# Altium PCB Car_seesaw.pcbdoc
Units mil, origin at the board's own origin, x right, y up, seen from the top; angles counter-clockwise.
Board outline 4957.01 x 4288.7 mil, 2 copper layers (Top Layer, Bottom Layer); 18 components, 28 nets, 169 pads, 13 vias.
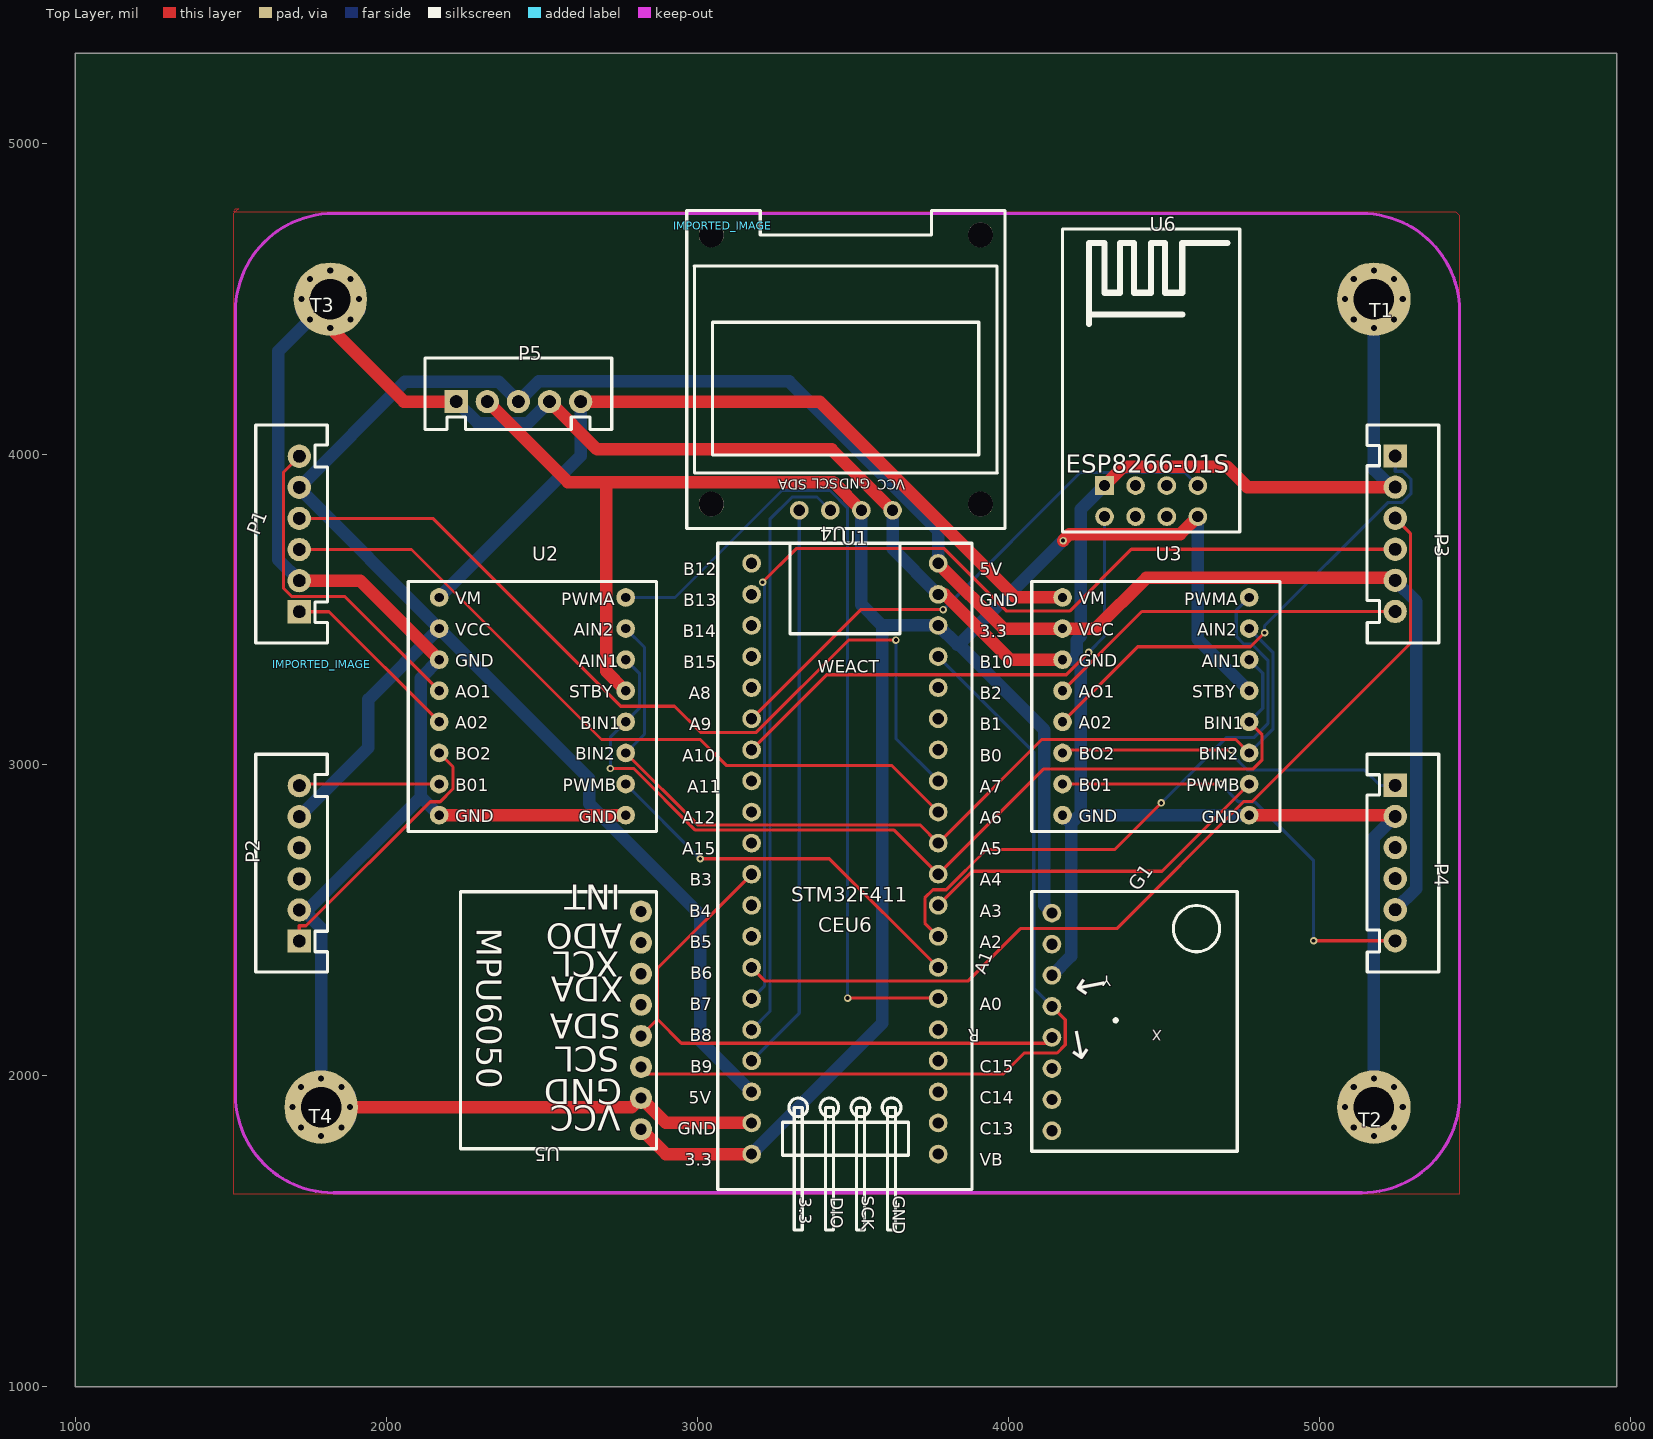
[diagram p0: Top Layer view]
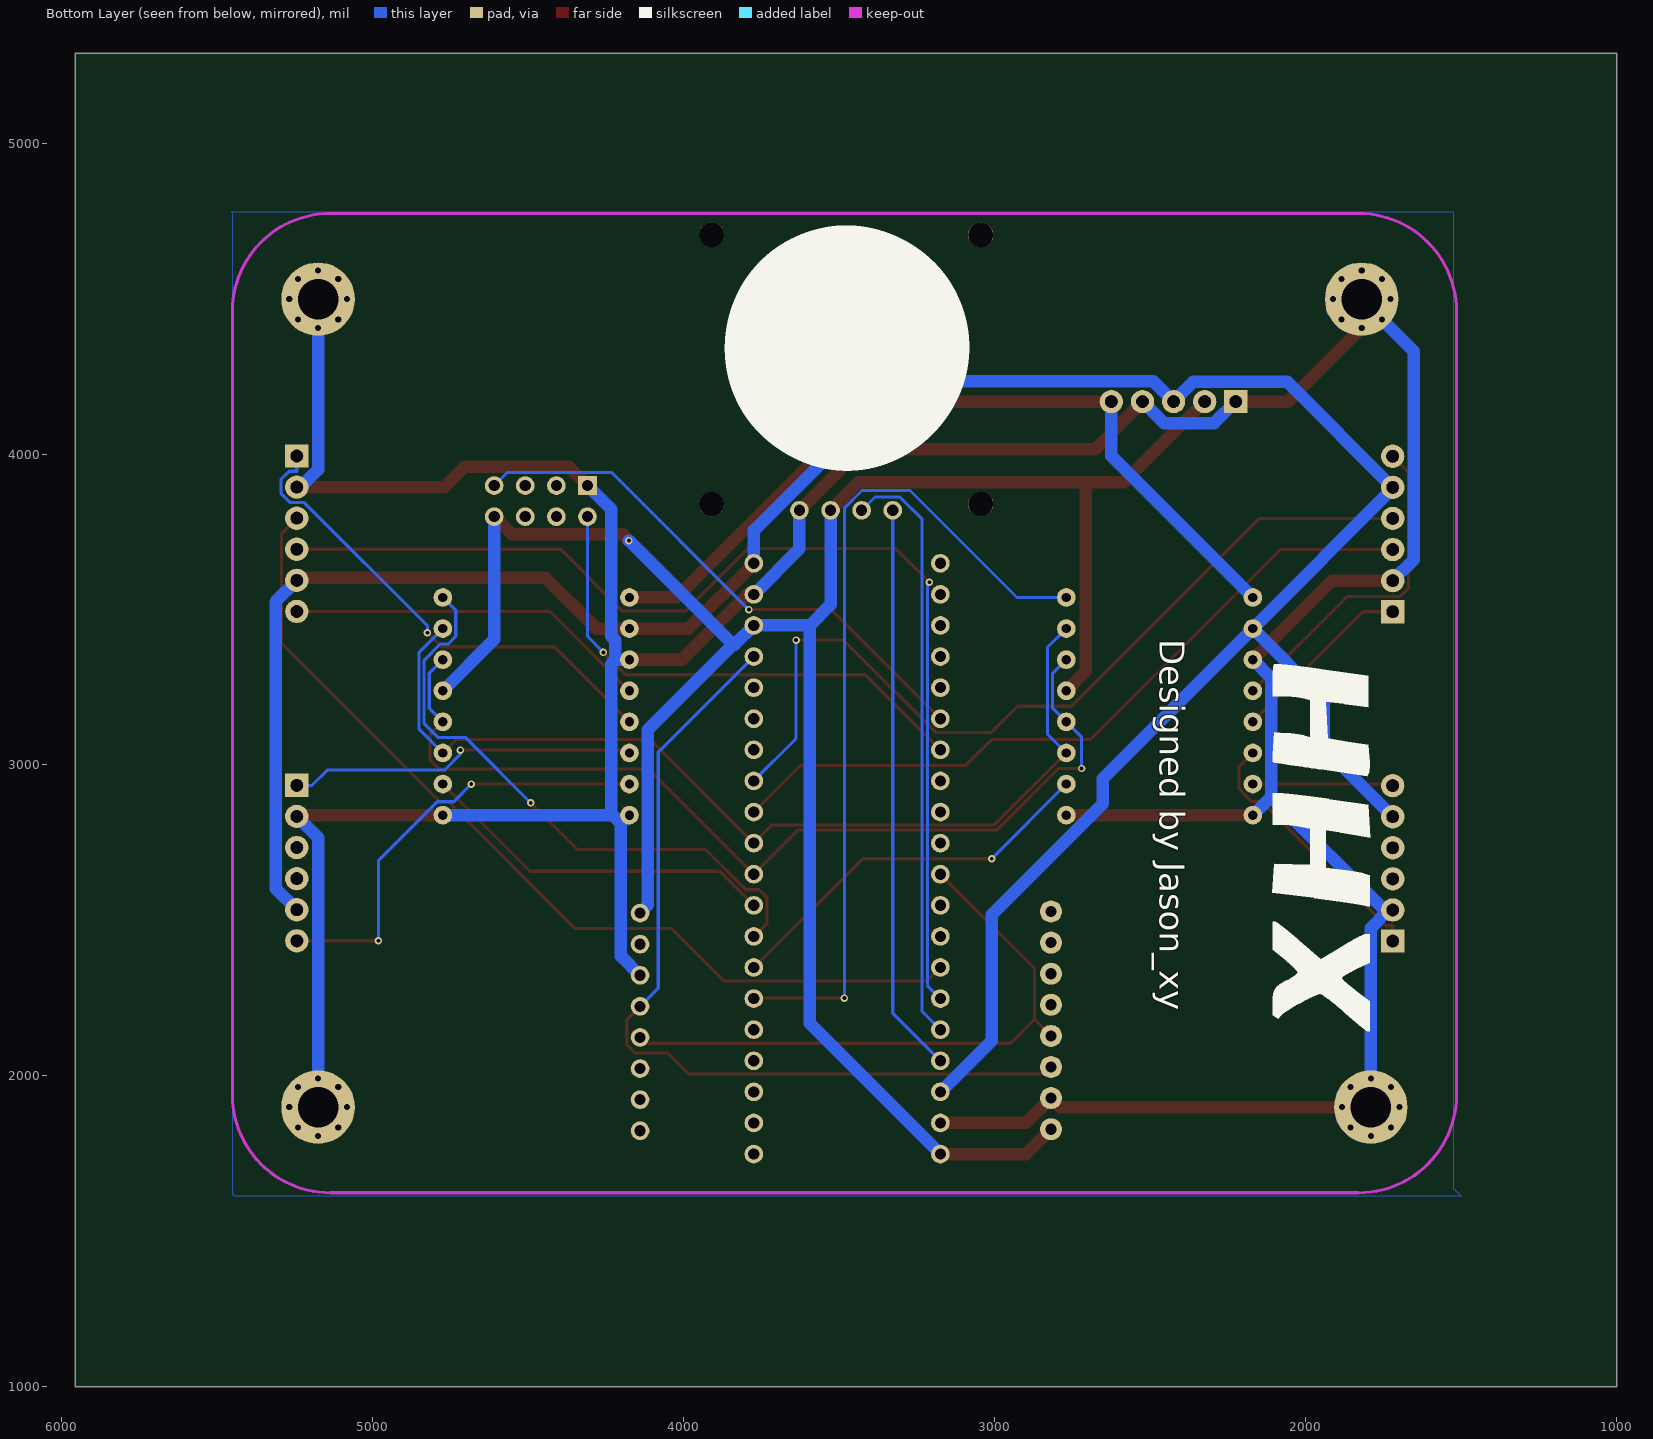
[diagram p1: Bottom Layer view, seen from below]

## Layer stack, top to bottom
Top Layer: signal copper (thickness not stored)
Dielectric: dielectric 12.6, FR-4, Dk 4.8
Bottom Layer: signal copper (thickness not stored)

## Board outline
5957.01,1000 1000,1000 1000,5288.7 5957.01,5288.7

## Components (designator, comment, footprint, x,y, rotation, side; value= is the part's Value field where it differs from the comment)
G1 "GY-86" GY-86 4340.79,2173.7 r0 top
IMPORTED_IMAGE "IMPORTED_IMAGE" IMPORTED_IMAGE 3082.44,4734.78 r0 top
IMPORTED_IMAGE "IMPORTED_IMAGE" IMPORTED_IMAGE 1792.52,3324.24 r0 top
P1 "XH2.54-6A" XH2.54-6P 1720,3742.9 r90 top
P2 "XH2.54-6A" XH2.54-6P 1720,2683.7 r90 top
P3 "XH2.54-6A" XH2.54-6P 5245,3743.7 r270 top
P4 "XH2.54-6A" XH2.54-6P 5245,2684.5 r270 top
P5 "XH2.54-5A" XH2.54-5P 2425,4193.7 r0 top
T1 "M3螺丝孔" 螺钉孔 5176.42,4498.11 r0 top
T2 "M3螺丝孔" 螺钉孔 5176.42,1899.68 r0 top
T3 "M3螺丝孔" 螺钉孔 1820,4498.11 r0 top
T4 "M3螺丝孔" 螺钉孔 1790.59,1899.68 r0 top
U1 "WEACT STM32F411CEU6" "WEACT STM32F411CEU6" 3475,2748.7 r0 top
U2 "TB6612" "DUAL TB6612FNG" 2470,3538.7 r0 top
U3 "TB6612" "DUAL TB6612FNG" 4475,3538.7 r0 top
U4 "OLED" OLED_0.96_4P_ZJY_NEW 3990,4783.7 r180 top
U5 "mpu6050" MPU6050 2819.21,1828.7 r180 top
U6 "ESP8266-01S" ESP8266-01S 4175,3748.7 r0 top

## Footprints (in the part's own frame and the unit in brackets; to place one, negate y for a bottom-side part, rotate by r counter-clockwise, add the part's x,y. Pads: shape width x height; smd on the part's side, far side on the other; paste and mask are expansions set on the pad)
"DUAL TB6612FNG" [mil]
  round 60 hole 30: 1(-300,0) 2(-300,-100) 3(-300,-200) 4(-300,-300) 5(-300,-400) 6(-300,-500) 7(-300,-600) 8(-300,-700) 9(300,-700) 10(300,-600) 11(300,-500) 12(300,-400) 13(300,-300) 14(300,-200) 15(300,-100) 16(300,0)
  silkscreen extent -399,-752 399,51
ESP8266-01S [mil]
  rect 60x60 hole 36: 1(135,150)
  round 60 hole 36: 2(235,150) 3(335,150) 4(435,150) 5(135,50) 6(235,50) 7(335,50) 8(435,50)
  silkscreen extent 0,0 570,975
GY-86 [mil]
  round 60 hole 36: 1(-200,350) 2(-200,250) 3(-200,150) 4(-200,50) 5(-200,-50) 6(-200,-150) 7(-200,-250) 8(-200,-350)
  silkscreen extent -265,-416 396,420
IMPORTED_IMAGE [mil]
MPU6050 [mm]
  round 1.8 hole 0.914: 1(0,0) 2(0,-2.54) 3(0,-5.08) 4(0,-7.62) 5(0,-10.16) 6(0,-12.7) 7(0,-15.24) 8(0,-17.78)
  silkscreen extent -1.27,-19.4 14.73,1.6
OLED_0.96_4P_ZJY_NEW [mil]
  round 60 hole 36: 1(361.81,964.56) 2(461.81,964.56) 3(561.81,964.56) 4(661.81,964.56)
  round 80 hole 80 unplated: ""(78.74,944.88) ""(78.74,78.74) ""(944.88,944.88) ""(944.88,78.74)
  silkscreen extent 0,0 1024,1024
"WEACT STM32F411CEU6" [mil]
  round 60 hole 36: 1(300,900) 2(300,800) 3(300,700) 4(300,600) 5(300,500) 6(300,400) 7(300,300) 8(300,200) 9(300,100) 10(300,0) 11(300,-100) 12(300,-200) 13(300,-300) 14(300,-400) 15(300,-500) 16(300,-600) 17(300,-700) 18(300,-800) 19(300,-900) 20(300,-1000) 21(-300,-1000) 22(-300,-900) 23(-300,-800) 24(-300,-700) 25(-300,-600) 26(-300,-500) 27(-300,-400) 28(-300,-300) 29(-300,-200) 30(-300,-100) 31(-300,0) 32(-300,100) 33(-300,200) 34(-300,300) 35(-300,400) 36(-300,500) 37(-300,600) 38(-300,700) 39(-300,800) 40(-300,900)
  silkscreen extent -409,-1244 409,965
XH2.54-5P [mil]
  rect 75x75 hole 40 slot 40.2 at 0 deg: 1(-200,-25)
  round 75 hole 40 slot 40.2 at 0 deg: 2(-100,-25) 3(0,-25) 4(100,-25) 5(200,-25)
  silkscreen extent -300,-115 300,115
XH2.54-6P [mil]
  rect 75x75 hole 40 slot 40.2 at 0 deg: 1(-250,-0.19)
  round 75 hole 40 slot 40.2 at 0 deg: 2(-150,-0.19) 3(-50,-0.19) 4(50,-0.19) 5(150,-0.19) 6(250,-0.39)
  silkscreen extent -350,-91 351,140
螺钉孔 [mm]
  round 1 hole 0.5: 1(-2.349,0) 1(-1.651,-1.651) 1(-1.651,1.651) 1(0,-2.349) 1(0,2.349) 1(1.651,-1.651) 1(1.651,1.651) 1(2.349,0)
  round 6 hole 3.302: 1(0,0)

## Via types
v1: diameter 24.02, hole 12.2, Top Layer to Bottom Layer, 13 vias

## Nets (pads, with @x,y where several pads share a name; then routed paths per layer and width w, separated by ;. In a path a pad name is that pad's centre, name@x,y a point inside that pad or via, vN(x,y) a via of type N, cw(c..) or ccw(c..) an arc to the next point about the centre after c; other vN are vias at no path point)
3V3: G1.1 P5.2 U1.3 U1.21 U2.13 U3.13 U4.2 U5.1 U6.8 | length 7532.6
  Top Layer w40.16: P5.2 2584,3909.7 2707.1,3909.7 ; U2.13 2707.1,3301.6 2707.1,3909.7 ; U5.1 2899.2,1748.7 U1.21 ; U4.2 3437.6,3909.7 2707.1,3909.7 ; v1(4176.7,3721.9) 4197.1,3742.2 4553.5,3742.2 U6.8
  Bottom Layer w40.16: U1.21 3595,2168.7 3595,3448.7 ; U4.2 3528.2,3515.5 3595,3448.7 ; G1.1 4116.2,2548.3 4116.2,3112.5 3841.8,3386.9 ; v1(4176.7,3721.9) 3841.8,3386.9 ; U6.8 4610,3403.7 U3.13 ; 3595,3448.7 U1.3 3836.8,3386.9 3841.8,3386.9
5V: P1.5 P2.5 P3.5 P4.5 P5.3 U1.1 U1.23 U2.2 U3.2 | length 8635
  Top Layer w40.16: U1.1 3985,3438.7 U3.2 4281.4,3438.7 4444.7,3601.9 5236.6,3601.9 P3.5
  Bottom Layer w40.16: P2.5 1942.1,3055.6 1942.1,3210.8 U2.2 ; U1.23 3009.6,2114.1 3009.6,2518.5 2653.2,2874.9 2653.2,2955.5 U2.2 ; U1.1 3775,3754.7 3295.7,4234 2490.3,4234 P5.3 2361,4232.7 2060,4232.7 P1.5 1720.2,3888.5 U2.2 ; P4.5 5312.8,2602.5 5312.8,3525.7 P3.5
12V: P5.5 U2.1 U3.1 | length 2629.4
  Top Layer w40.16: P5.5 3393.9,4168.7 4023.9,3538.7 U3.1
  Bottom Layer w40.16: U2.1 2625,3993.7 P5.5
GND: G1.3 P1.2 P2.2 P3.2 P4.2 P5.1 P5.4 T1.1 T2.1 T3.1 T4.1 U1.2 U1.22 U2.3 U2.8 U2.9 U3.3 U3.8 U3.9 U4.1 U5.2 U6.1 | length 15649.7
  Top Layer w40.16: T4.1@1698.1,1899.7 T4.1@1790.6,1899.7 ; P1.2 1915.8,3592.9 U2.3 ; T4.1@1725.6,1834.7 1763.1,1834.7 1790.6,1807.2 1818.1,1834.7 T4.1@1855.6,1834.7 ; T4.1@1725.6,1964.7 1763.1,1964.7 1790.6,1992.2 1818.1,1964.7 T4.1@1855.6,1964.7 ; T3.1@1727.5,4498.1 T3.1@1820,4498.1 ; T3.1@1755,4563.1 1792.5,4563.1 1820,4590.6 1847.5,4563.1 T3.1@1885,4563.1 ; T4.1@1883.1,1899.7 2790.2,1899.7 U5.2 2899.2,1848.7 U1.22 ; T3.1@1885,4433.1 1847.5,4433.1 1820,4405.6 2056.9,4168.7 P5.1 ; U2.8 U2.9 ; P5.4 2678.4,4015.3 3432,4015.3 U4.1 ; U1.2 3796.1,3548.7 4006.1,3338.7 U3.3 ; U6.1 4369.7,3958.4 4704.8,3958.4 4769.5,3893.7 P3.2 ; U3.9 5240.6,2838.7 P4.2 ; T2.1@5083.9,1899.7 T2.1@5176.4,1899.7 ; T2.1@5111.4,1834.7 5148.9,1834.7 5176.4,1807.2 5203.9,1834.7 T2.1@5241.4,1834.7 ; T2.1@5111.4,1964.7 5148.9,1964.7 T2.1@5176.4,1992.2 ; T1.1@5111.4,4433.1 5148.9,4433.1 5176.4,4405.6 5203.9,4433.1 T1.1@5241.4,4433.1 ; T1.1@5111.4,4563.1 5148.9,4563.1 T1.1@5176.4,4590.6
  Bottom Layer w40.16: T4.1@1698.1,1899.7 1698.1,1862.2 T4.1@1725.6,1834.7 ; P2.2 1732.6,2533.7 P2.2@1739.8,2526.5 ; P1.2 1653.3,3659.8 1653.3,4331.4 1755,4433.1 1727.5,4460.6 1727.5,4498.1 1727.5,4535.6 T3.1@1755,4563.1 ; T4.1@1790.6,1992.2 1790.6,2475.7 P2.2@1739.8,2526.5 ; T4.1@1855.6,1834.7 1883.1,1862.2 1883.1,1899.7 1883.1,1937.2 T4.1@1855.6,1964.7 ; T3.1@1885,4433.1 1912.5,4460.6 1912.5,4498.1 1912.5,4535.6 T3.1@1885,4563.1 ; U2.8 2111,2897.7 ; U2.3 2111,3279.7 2111,2897.7 ; P5.1 2294.4,4099.3 2455.6,4099.3 P5.4 ; U4.1 3628.2,3695.5 U1.2 ; G1.3 4202.4,2385.3 4202.4,2811.3 ; U3.8 4202.4,2811.3 ; U3.3 4220.2,3338.7 ; U6.1 4234.2,3822.9 4234.2,3414.5 4220.2,3400.5 4220.2,3338.7 ; U3.9 4234.2,2838.7 ; T2.1@5111.4,1834.7 5083.9,1862.2 5083.9,1899.7 5083.9,1937.2 T2.1@5111.4,1964.7 ; T1.1@5111.4,4433.1 5083.9,4460.6 5083.9,4498.1 5083.9,4535.6 T1.1@5111.4,4563.1 ; T2.1@5176.4,1992.2 5176.4,2766.1 P4.2 ; T1.1@5176.4,4498.1 5176.4,4405.6 5176.4,3949.7 5232.4,3893.7 P3.2 ; T2.1@5241.4,1834.7 5268.9,1862.2 5268.9,1899.7 5268.9,1937.2 T2.1@5241.4,1964.7 ; T1.1@5241.4,4433.1 5268.9,4460.6 5268.9,4498.1 5268.9,4535.6 T1.1@5241.4,4563.1 ; P2.2@1739.8,2526.5 2111,2897.7 ; 4202.4,2811.3 4229.8,2838.7 4234.2,2838.7 ; 4220.2,3338.7 4234.2,3324.6 4234.2,2838.7
I2C1_SCL: U1.25 U4.3 | length 1908.1
  Bottom Layer w10.24: U1.25 3233.6,2207.3 3233.6,3790.5 3305.1,3862 3385.3,3862 U4.3
I2C1_SDA: U1.24 U4.4 | length 1833.9
  Bottom Layer w10.24: U1.24 3328.2,2201.9 U4.4
I2C2_SCL: G1.4 U1.4 U5.3 | length 2830.6
  Top Layer w10.24: U5.3 2841.7,2006.2 3984.1,2006.2 4051.6,2073.7 4157.5,2073.7 4183.6,2099.8 4183.6,2180.9 G1.4
  Bottom Layer w10.24: U1.4 4082.3,3041.4 4082.3,2282.2 G1.4
I2C2_SDA: G1.5 U1.30 U5.4 | length 1975.5
  Top Layer w10.24: U5.4 2872.3,2181.7 ; U1.30 2872.3,2346 2872.3,2181.7 ; G1.5 4122,2104.9 2949.1,2104.9 2872.3,2181.7
M1+: P1.6 U2.4 | length 1083
  Top Layer w10.24: P1.6 1669.4,3941.9 1669.4,3568.1 1695.6,3541.9 1866.8,3541.9 U2.4
M1-: P1.1 U2.5 | length 596.5
  Top Layer w10.24: P1.1 1815.8,3492.9 U2.5
M2+: P2.6 U2.7 | length 451.7
  Top Layer w10.24: P2.6 1725.4,2938.7 U2.7
M2-: P2.1 U2.6 | length 859.9
  Top Layer w10.24: P2.1 1720.2,2482.7 1741.8,2482.7 2141,2881.8 2173.2,2881.8 2214.7,2923.3 2214.7,2994 U2.6
M3+: P3.6 U3.4 | length 1175.2
  Top Layer w10.24: U3.4 4430,3493.7 P3.6
M3-: P3.1 U3.5 | length 1593.7
  Top Layer w10.24: U3.5 4416.5,3380.2 4779.5,3380.2 v1(4824.5,3425.2)
  Bottom Layer w10.24: v1(4824.5,3425.2) 4824.5,3447.4 5220.8,3843.7 5265.7,3843.7 5295.8,3873.8 5295.8,3918.2 5269.3,3944.7 5244.8,3944.7 P3.1
M4+: P4.6 U3.7 | length 1429.4
  Top Layer w10.24: U3.7 v1(4684,2938.7) ; v1(4982.3,2434.5) P4.6
  Bottom Layer w10.24: v1(4684,2938.7) 4740.6,2882 4792.5,2882 4982.3,2692.2 v1(4982.3,2434.5)
M4-: P4.1 U3.6 | length 1128.3
  Top Layer w10.24: U3.6 4184.2,3047.9 v1(4718.7,3047.9)
  Bottom Layer w10.24: v1(4718.7,3047.9) 4718.7,3034.7 4769.9,2983.5 5146.8,2983.5 5195.8,2934.5 P4.1
PA4: U1.11 U2.12 U2.14 U3.12 U3.14 | length 3171.6
  Top Layer w10.24: v1(2720.8,2988.7) 2795.9,2988.7 2994.1,2790.5 3633.2,2790.5 U1.11 4113.2,2986.9 4786.7,2986.9 4816.9,3017.1 4816.9,3096.8 U3.12
  Bottom Layer w10.24: v1(2720.8,2988.7) 2720.8,3089.5 U2.12 2813.9,3182.6 2813.9,3294.8 U2.14 ; U3.12 4818.9,3182.6 4818.9,3294.8 U3.14
PA5: U1.10 U2.11 U2.15 U3.11 U3.15 | length 3195.5
  Top Layer w10.24: U2.11 3001.5,2807.2 3716.5,2807.2 U1.10 4108.8,3082.4 4731.3,3082.4 U3.11
  Bottom Layer w10.24: U2.11 2830.5,3099.2 2830.5,3378.2 U2.15 ; U3.11 4852.2,3115.9 4852.2,3361.5 U3.15
TIM2_CH1: U1.15 U2.16 | length 2747.7
  Top Layer w10.24: v1(3483.5,2250.3) 3773.4,2250.3 U1.15
  Bottom Layer w10.24: U2.16 2928.5,3538.7 3272.7,3882.9 3426.9,3882.9 3483.5,3826.2 v1(3483.5,2250.3)
TIM2_CH2: U1.14 U2.10 | length 1249.4
  Top Layer w10.24: v1(3010,2698.7) 3425,2698.7 U1.14
  Bottom Layer w10.24: U2.10 v1(3010,2698.7)
TIM2_CH3: U1.13 U3.16 | length 1957.1
  Top Layer w10.24: U1.13 3732.2,2491.5 3732.2,2572.6 3758.3,2598.7 3800.9,2598.7 3930.5,2728.2 4342.6,2728.2 v1(4492.2,2877.8)
  Bottom Layer w10.24: v1(4492.2,2877.8) 4703,3088.7 4791.2,3088.7 4835.5,3133.1 4835.5,3337.4 4784.2,3388.7 4758.6,3388.7 4733.5,3413.9 4733.5,3497.2 U3.16
TIM2_CH4: U1.12 U3.10 | length 1161.5
  Top Layer w10.24: U1.12 3884.7,2658.4 4494.7,2658.4 U3.10
TIM3_CH1: P1.3 U1.9 | length 2404.4
  Top Layer w10.24: P1.3 2081.1,3692.9 2692.2,3081.9 3010.3,3081.9 3093.5,2998.7 3625,2998.7 U1.9
TIM3_CH2: P1.4 U1.8 | length 2836.4
  Top Layer w10.24: P1.4 2149.4,3792.9 2753.6,3188.7 2927,3188.7 3010.9,3104.8 3189.8,3104.8 3486.8,3401.8 v1(3639.2,3401.8)
  Bottom Layer w10.24: v1(3639.2,3401.8) 3639.2,3084.5 U1.8
TIM4_CH1: P3.3 U1.27 | length 3009.9
  Top Layer w10.24: U1.27 3218.8,2304.9 3870.4,2304.9 4039.2,2473.7 4349.3,2473.7 4758.5,2882.8 4785.9,2882.8 5293.8,3390.8 5293.8,3744.7 P3.3
TIM4_CH2: P3.4 U1.26 | length 3604
  Top Layer w10.24: v1(3210.1,3587.6) 3318.3,3695.8 3794.3,3695.8 3995.1,3495 4197.6,3495 4396.4,3693.7 P3.4
  Bottom Layer w10.24: U1.26 3216.8,2290.5 3216.8,3580.9 v1(3210.1,3587.6)
USART1_RX: U1.34 U6.5 | length 1671.2
  Top Layer w10.24: U1.34 3416.7,3290.4 4186.8,3290.4 v1(4258.6,3362.2)
  Bottom Layer w10.24: v1(4258.6,3362.2) 4310,3413.6 U6.5
USART1_TX: U1.35 U6.4 | length 1780.5
  Top Layer w10.24: U1.35 3526,3499.7 v1(3790.7,3499.7)
  Bottom Layer w10.24: v1(3790.7,3499.7) 4231.8,3940.8 4567.9,3940.8 U6.4
pads on no net: G1.2 G1.6 G1.7 G1.8 P2.3 P2.4 P4.3 P4.4 U1.5 U1.6 U1.7 U1.16 U1.17 U1.18 U1.19 U1.20 U1.28 U1.29 U1.31 U1.32 U1.33 U1.36 U1.37 U1.38 U1.39 U1.40 U4. U5.5 U5.6 U5.7 U5.8 U6.2 U6.3 U6.6 U6.7

## Polygon pours and split planes (outlines as drawn)
GND on Bottom Layer (solid): 1525,4778.7 1525,1638.7 1500,1613.7 5445,1613.7 5450,1618.7 5450,4773.7 5455,4778.7
GND on Top Layer (solid): 1510,1618.7 1510,4773.7 1515,4778.7 1510,4778.7 1515,4788.7 1525,4788.7 1515,4778.7 5440,4778.7 5450,4768.7 5450,1618.7 1510,1618.7

## Keep-outs
Keep-Out Layer:
  lines w10: 1515,1939.05 ccw(c1829.96,1939.06) 1829.96,1624.09 ; 1515,4458.74 cw(c1829.96,4458.74) 1829.96,4773.7 ; 5137.05,1624.09 ccw(c5137.05,1939.06) 5452.01,1939.05 ; 5137.05,4773.7 cw(c5137.05,4458.74) 5452.01,4458.74

## Silkscreen, mask and mechanical layers (free items; w line width, h text height)
Bottom Overlay:
  text "Designed by Jason_xy" at 2470,3403.7 h80 r90

## Text inside footprints (layer, text, board x,y; h text height)
G1: Top Overlay "↑" at 4265.79,2183.7 h157.48 r191; Top Overlay "↑" at 4350.79,2253.7 h157.48 r101; Top Overlay "Y" at 4330.79,2333.7 h59.05 r180; Top Overlay "X" at 4495.79,2158.7 h59.05 r178
U1: Top Overlay "5V" at 3908.07,3610.91 h39.37; Top Overlay "GND" at 3908.07,3510.91 h39.37; Top Overlay "3.3" at 3908.07,3410.91 h39.37; Top Overlay "B10" at 3908.07,3310.91 h39.37; Top Overlay "B2" at 3908.07,3210.91 h39.37; Top Overlay "B1" at 3908.07,3110.91 h39.37; Top Overlay "B0" at 3908.07,3010.91 h39.37; Top Overlay "A7" at 3908.07,2910.91 h39.37; Top Overlay "A6" at 3908.07,2810.91 h39.37; Top Overlay "A5" at 3908.07,2710.91 h39.37; Top Overlay "A4" at 3908.07,2610.91 h39.37; Top Overlay "A3" at 3908.07,2510.91 h39.37; Top Overlay "A2" at 3908.07,2410.91 h39.37; Top Overlay "A1" at 3926.45,2323.54 h39.37 r69; Top Overlay "A0" at 3908.07,2210.91 h39.37; Top Overlay "R" at 3908.07,2150.28 h39.37 r180; Top Overlay "C15" at 3908.07,2010.9 h39.37; Top Overlay "C14" at 3908.07,1910.9 h39.37; Top Overlay "C13" at 3908.07,1810.9 h39.37; Top Overlay "VB" at 3908.07,1710.9 h39.37; Top Overlay "3.3" at 2960.71,1710.9 h39.37; Top Overlay "GND" at 2937.42,1810.9 h39.37; Top Overlay "5V" at 2972.52,1910.9 h39.37; Top Overlay "B9" at 2977.92,2010.9 h39.37; Top Overlay "B8" at 2976.11,2110.91 h39.37; Top Overlay "B7" at 2976.11,2210.91 h39.37; Top Overlay "B6" at 2977.92,2310.91 h39.37; Top Overlay "B5" at 2976.11,2410.91 h39.37; Top Overlay "B4" at 2974.31,2510.91 h39.37; Top Overlay "B3" at 2976.11,2610.91 h39.37; Top Overlay "A15" at 2951.71,2710.91 h39.37; Top Overlay "A12" at 2951.71,2810.91 h39.37; Top Overlay "A11" at 2967.82,2910.91 h39.37; Top Overlay "A10" at 2951.71,3010.91 h39.37; Top Overlay "A9" at 2974.31,3110.91 h39.37; Top Overlay "A8" at 2972.52,3210.91 h39.37; Top Overlay "B15" at 2955.32,3310.91 h39.37; Top Overlay "B14" at 2953.51,3410.91 h39.37; Top Overlay "B13" at 2955.32,3510.91 h39.37; Top Overlay "B12" at 2955.32,3610.91 h39.37; Top Overlay "3.3" at 3328.93,1610.51 h39.37 r270; Top Overlay "DIO" at 3428.93,1610.51 h39.37 r270; Top Overlay "SCK" at 3528.93,1614.44 h39.37 r270; Top Overlay "GND" at 3628.93,1614.44 h39.37 r270; Top Overlay "WEACT" at 3388.39,3295.95 h39.37; Top Overlay "STM32F411" at 3301.77,2559.73 h47.24; Top Overlay "CEU6" at 3389.17,2461.3 h47.24
U2: Document "TB6612FNG" at 2280.9,3616.2 h50; Top Overlay "VCC" at 2222,3416.3 h40; Top Overlay "GND" at 2222,3316.3 h40; Top Overlay "AO1" at 2222,3216.3 h40; Top Overlay "B01" at 2222,2916.3 h40; Top Overlay "GND" at 2222,2816.3 h40; Top Overlay "GND" at 2618.4,2812.5 h40; Top Overlay "PWMB" at 2567.2,2914.8 h40; Top Overlay "BIN2" at 2608.2,3017.2 h40; Top Overlay "BIN1" at 2623.5,3114.4 h40; Top Overlay "STBY" at 2587.8,3216.8 h40; Top Overlay "AIN1" at 2618.4,3314 h40; Top Overlay "AIN2" at 2603.1,3416.4 h40; Top Overlay "PWMA" at 2562.1,3513.6 h40; Top Overlay "VM" at 2222,3516.3 h40; Top Overlay "A02" at 2222,3116.3 h40; Top Overlay "BO2" at 2222,3016.3 h40
U3: Document "TB6612FNG" at 4285.9,3616.2 h50; Top Overlay "VCC" at 4227,3416.3 h40; Top Overlay "GND" at 4227,3316.3 h40; Top Overlay "AO1" at 4227,3216.3 h40; Top Overlay "B01" at 4227,2916.3 h40; Top Overlay "GND" at 4227,2816.3 h40; Top Overlay "GND" at 4623.4,2812.5 h40; Top Overlay "PWMB" at 4572.2,2914.8 h40; Top Overlay "BIN2" at 4613.2,3017.2 h40; Top Overlay "BIN1" at 4628.5,3114.4 h40; Top Overlay "STBY" at 4592.8,3216.8 h40; Top Overlay "AIN1" at 4623.4,3314 h40; Top Overlay "AIN2" at 4608.1,3416.4 h40; Top Overlay "PWMA" at 4567.1,3513.6 h40; Top Overlay "VM" at 4227,3516.3 h40; Top Overlay "A02" at 4227,3116.3 h40; Top Overlay "BO2" at 4227,3016.3 h40
U4: Document "0.96” OLED" at 3686.85,4232.52 h80 r180; Top Overlay "SDA" at 3352.21,3917.81 h32 r180; Top Overlay "SCL" at 3452.6,3919.78 h32 r180; Top Overlay "VCC" at 3669.13,3917.81 h32 r180; Top Overlay "GND" at 3556.93,3919.78 h32 r180
U5: Top Overlay "VCC" at 2754.21,1903.9 h80 r180; Top Overlay "GND" at 2759.21,1988.7 h80 r180; Top Overlay "SCL" at 2749.21,2093.7 h80 r180; Top Overlay "SDA" at 2754.21,2199.3 h80 r180; Top Overlay "XDA" at 2764.21,2319.3 h80 r180; Top Overlay "ADO" at 2759.21,2489.3 h80 r180; Top Overlay "XCL" at 2749.21,2399.3 h80 r180; Top Overlay "INT" at 2754.21,2614.3 h80 r180; Top Overlay "MPU6050" at 2290.61,2476.3 h80 r270